# Altium PCB PCB1.PcbDoc
Units mm, origin at the board's own origin, x right, y up, seen from the top; angles counter-clockwise.
Board outline 152.4 x 101.6 mm, 2 copper layers (Top Layer, Bottom Layer); 9 components, 15 nets, 63 pads, 9 vias.
Unrouted connection lines stored in the file: 3.
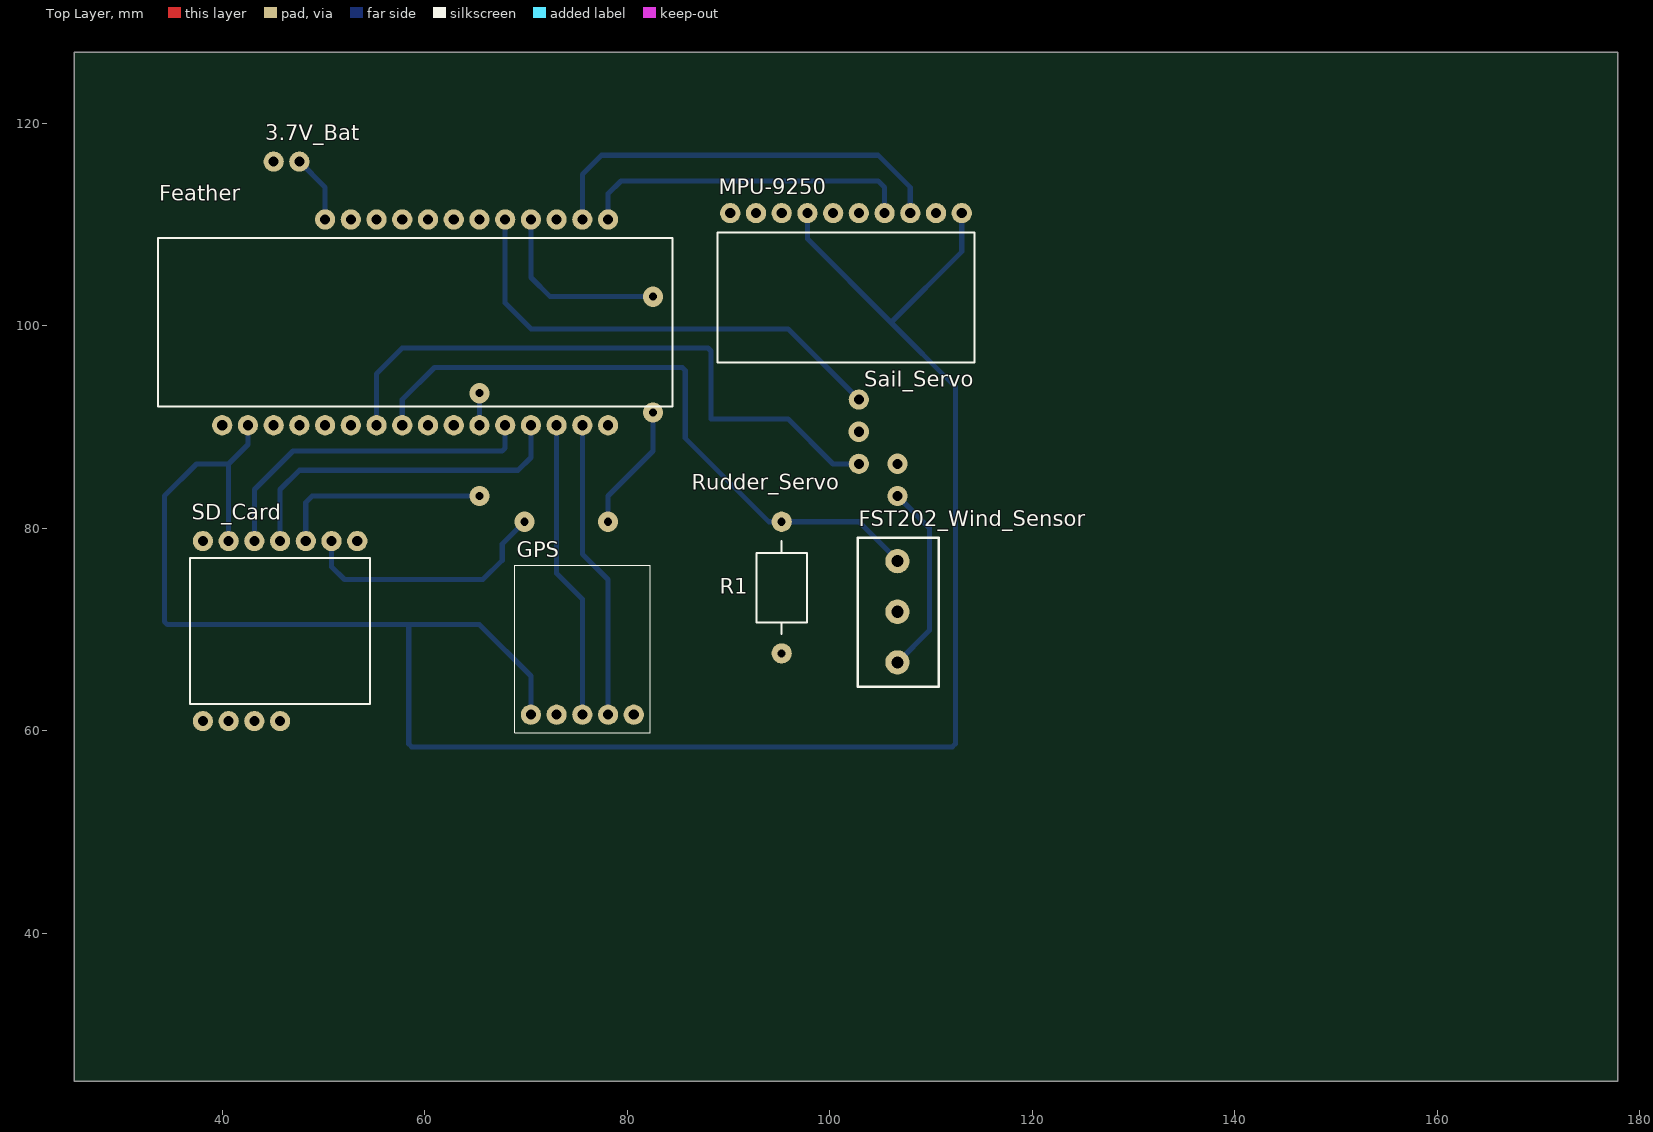
[diagram p0: Top Layer view]
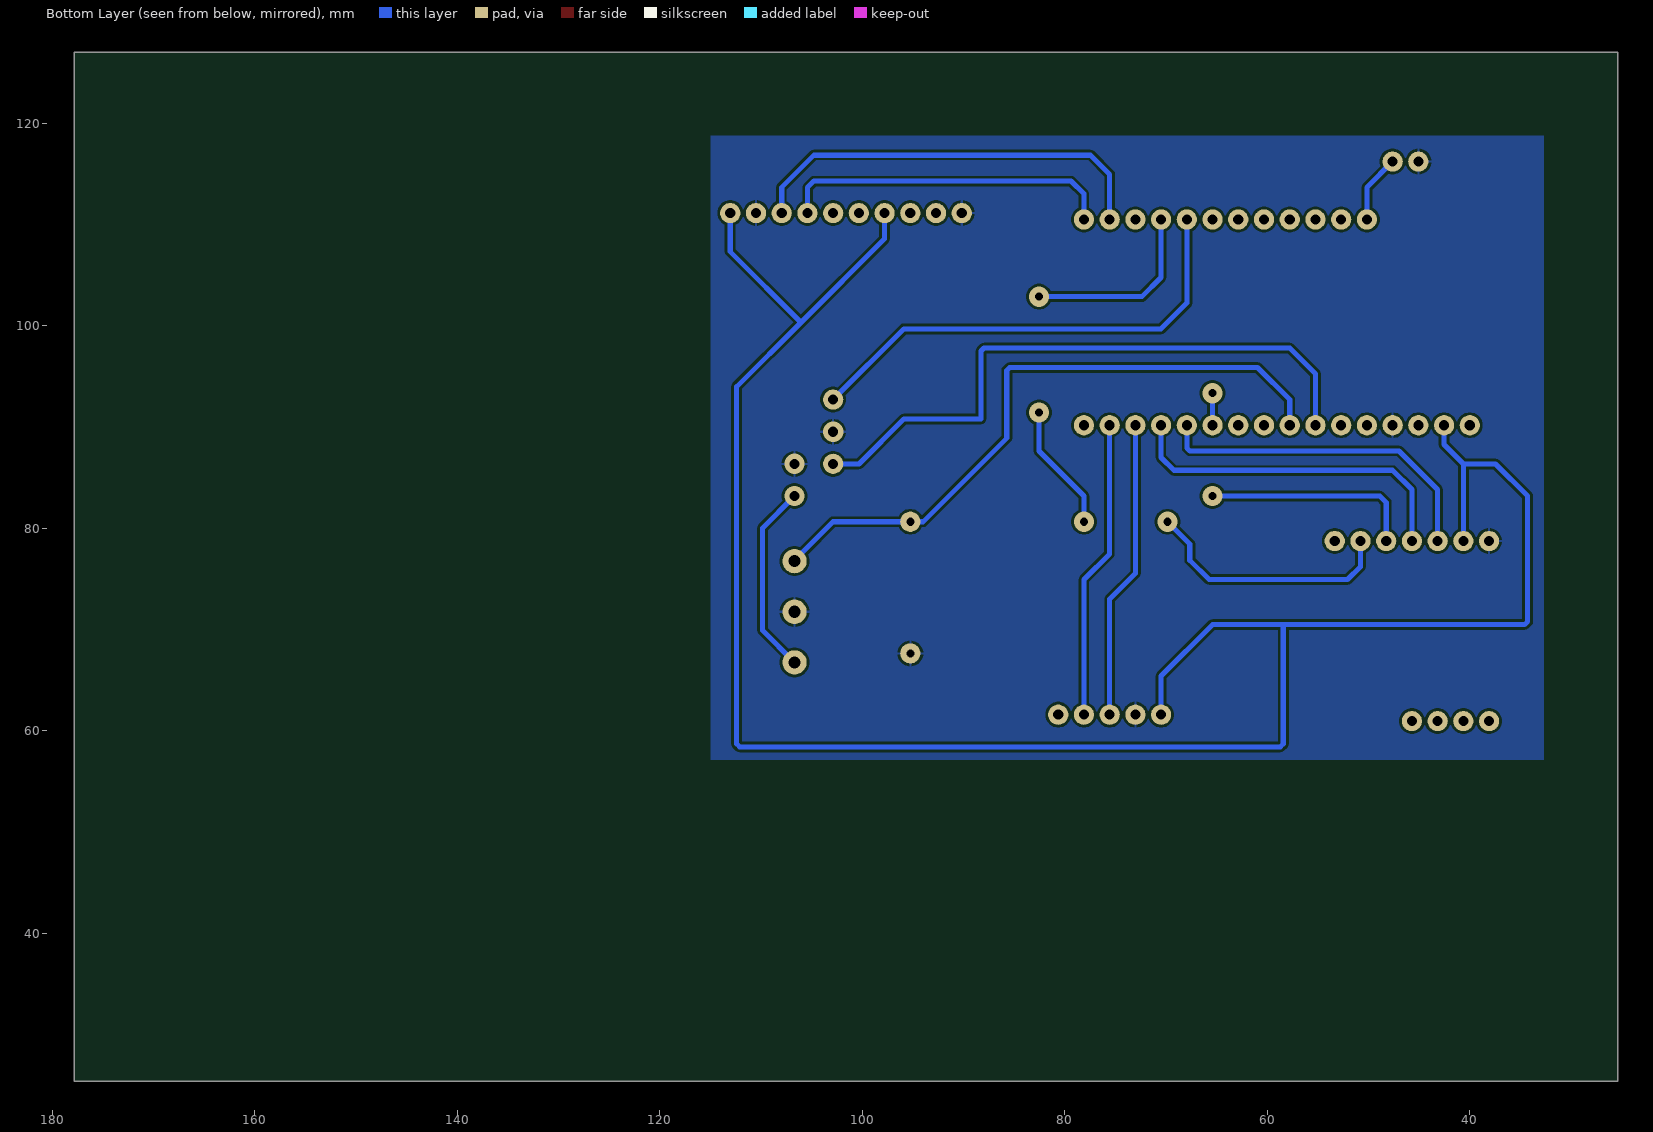
[diagram p1: Bottom Layer view, seen from below]

## Layer stack, top to bottom
Top Solder: solder mask 0.0102, Solder Resist, Dk 3.5
Top Layer: signal copper 0.0356
Dielectric 1: dielectric 0.32, FR-4, Dk 4.8
Bottom Layer: signal copper 0.0356
Bottom Solder: solder mask 0.0102, Solder Resist, Dk 3.5

## Board outline
25.4,25.4 177.8,25.4 177.8,127 25.4,127

## Design rules (kind name [scope] priority, off if disabled: settings)
Clearance [All] p1: gap=0.254 ignorepadtopadclearanceinfootprint=FALSE except(0: Arc-Hole Track-Hole SMDPad-Hole THPad-Hole Via-Hole Fill-Hole Poly-Hole Region-Hole Text-Hole; 0.33: Arc-Arc Arc-Track Arc-Via Track-Track Track-Via)
PlaneClearance [All] p1: clearance=1.143
PolygonConnect [All] p1: connectstyle=Relief reliefconductorwidth=0.254 reliefentries=4 polygonreliefangle="90 Angle" airgapwidth=0.254
RoomDefinition Sheet1 [InComponentClass('Sheet1')] p1: confinementstyle=ConfineIn formatcopy=TRUE lockcomponents=FALSE outline 24.13,50.165 122.555,50.165 122.555,121.92 24.13,121.92
RoutingVias [All] p1: holewidth=1 width=2 viastyle="Through Hole" minholewidth=1 minwidth=1.27 maxholewidth=2 maxwidth=2.032
SolderMaskExpansion [All] p1: expansion=0.102 istentingtop=FALSE
Width [All] p1: maxlimit=0.508 minlimit=0.254 preferedwidth=0.508
29 further rules are at their usual default settings.

## Components (designator, comment, footprint, x,y, rotation, side; value= is the part's Value field where it differs from the comment)
3.7V_Bat "Power_Input" POWER_INPUT 47.625,116.205 r270 top
Feather "Adafuit_feather_STM32F405" ADAFUIT_FEATHER_STM32F405 40.005,90.17 r90 top locked
FST202_Wind_Sensor "Screw_Terminal" SCREW_TERMINAL 106.68,76.755 r0 top
GPS "GPS_ATGM336H" GPS 70.485,61.595 r90 top
MPU-9250 "MPU-9250/6500" MPU-9250/6500 113.03,111.125 r270 top
R1 "Res1" Resistor 95.25,80.645 r270 top value=1K
Rudder_Servo "External_Connection_output" CONNECTOR 102.87,86.36 r90 top
Sail_Servo "External_Connection_output" CONNECTOR 102.87,92.71 r90 top
SD_Card "SD_Card_Socket" SD_CARD_SOCKET 38.1,60.96 r90 top

## Footprints (in the part's own frame and the unit in brackets; to place one, negate y for a bottom-side part, rotate by r counter-clockwise, add the part's x,y. Pads: shape width x height; smd on the part's side, far side on the other; paste and mask are expansions set on the pad)
ADAFUIT_FEATHER_STM32F405 [mm]
  round 2 hole 1: 3.3V(0,-2.54) 3.3V(1)(0,-5.08) 5(20.32,-33.02) 6(20.32,-30.48) 9(20.32,-27.94) 10(20.32,-25.4) 11(20.32,-22.86) 12(20.32,-20.32) 13(20.32,-17.78) A0(0,-10.16) A1(0,-12.7) A2(0,-15.24) A3(0,-17.78) A4(0,-20.32) A5(0,-22.86) B0(0,-38.1) BAT(20.32,-10.16) EN(20.32,-12.7) GND(0,-7.62) MI(0,-30.48) MO(0,-27.94) RST(0,0) RX(0,-33.02) SCK(0,-25.4) SCL(20.32,-35.56) SDA(20.32,-38.1) TX(0,-35.56) USB(20.32,-15.24)
  silkscreen extent 1.84,-44.45 18.48,6.35
CONNECTOR [mm]
  round 2 hole 1: 1(0,0)
GPS [mm]
  round 2 hole 1: GND(0,-2.54) PPS(0,-10.16) RX(0,-7.62) TX(0,-5.08) VCC(0,0)
  silkscreen extent -1.8,-11.8 14.73,1.6
MPU-9250/6500 [mm]
  round 2 hole 1: AD0(0,-15.24) ECL(0,-12.7) EDA(0,-10.16) FSYNC(0,-22.86) GND(0,-2.54) INT(0,-17.78) NCS(0,-20.32) SCL(0,-5.08) SDA(0,-7.62) VCC(0,0)
  silkscreen extent 1.9,-24.13 14.73,1.27
POWER_INPUT [mm]
  round 2 hole 1: BAT(0,0) GND(0,-2.54)
Resistor [mm]
  round 2 hole 0.8: A3(0,0) GND(13,0)
  silkscreen extent 1.9,-2.5 11.1,2.5
SCREW_TERMINAL [mm]
  round 2.4 hole 1.2: 2(0,-5) 3(0,-10) A3(0,0)
  silkscreen extent -3.94,-12.42 4.06,2.31
SD_CARD_SOCKET [mm]
  round 2 hole 1: CD(17.78,-15.24) CS(17.78,-12.7) DAT1/IRQ(0,-7.62) DAT2(0,-5.08) DI(17.78,-5.08) DO(17.78,-7.62) GND(17.78,0) GND(1)(0,0) SCLK(17.78,-10.16) VDD(17.78,-2.54) VDD(1)(0,-2.54)
  silkscreen extent 1.7,-16.51 16.1,1.27

## Part data
R1: "Resistor", LatestRevisionDate=17-Jul-2002, LatestRevisionNote="Re-released for DXP Platform.", PackageDescription="Axial Device, Thru-Hole; 2 Leads; 0.3 in Pin Spacing", PackageReference=AXIAL-0.3, Published=8-Jun-2000, Publisher="Altium Limited"

## Via types
v1: diameter 2, hole 0.8, Top Layer to Bottom Layer, 6 vias
v2: diameter 2, hole 1, Top Layer to Bottom Layer, 3 vias

## Nets (pads, with @x,y where several pads share a name; then routed paths per layer and width w, separated by ;. In a path a pad name is that pad's centre, name@x,y a point inside that pad or via, vN(x,y) a via of type N, cw(c..) or ccw(c..) an arc to the next point about the centre after c; other vN are vias at no path point)
GND: 3.7V_Bat.GND Feather.GND FST202_Wind_Sensor.2 GPS.GND MPU-9250.FSYNC MPU-9250.GND R1.GND SD_Card.GND
  other v2: 106.68,86.36 102.87,89.535
Net3.7V_Bat_BAT: 3.7V_Bat.BAT Feather.BAT | length 6.8
  Bottom Layer w0.508: 3.7V_Bat.BAT 50.165,113.665 Feather.BAT
NetFeather_3.3V: Feather.3.3V GPS.VCC MPU-9250.AD0 MPU-9250.VCC SD_Card.VDD | length 212.7
  Bottom Layer w0.508: SD_Card.VDD 40.64,86.36 ; Feather.3.3V 42.545,88.265 40.64,86.36 ; GPS.VCC 70.485,65.405 65.405,70.485 58.42,70.485 ; MPU-9250.AD0 97.79,108.585 106.045,100.33 ; MPU-9250.VCC 113.03,107.315 106.045,100.33 ; 40.64,86.36 37.465,86.36 34.29,83.185 34.29,70.783 34.588,70.485 58.42,70.485 ; 58.42,70.485 58.42,58.718 58.718,58.42 112.097,58.42 112.395,58.718 112.395,93.98 106.045,100.33
NetFeather_6: Feather.6 SD_Card.CS | length 56.6
  Bottom Layer w0.508: SD_Card.CS 50.8,76.2 52.07,74.93 65.742,74.93 67.653,76.841 67.653,78.448 v1(69.85,80.645) ; Feather.6 70.485,104.775 72.39,102.87 v1(82.55,102.87) ; v1(78.105,80.645) 78.105,83.185 82.55,87.63 v1(82.55,91.44)
NetFeather_9: Feather.9 Sail_Servo.1 | length 47.1
  Bottom Layer w0.508: Feather.9 67.945,102.235 70.485,99.695 95.885,99.695 Sail_Servo.1
NetFeather_A2: Feather.A2 Rudder_Servo.1 | length 62.4
  Bottom Layer w0.508: Feather.A2 55.245,95.25 57.785,97.79 87.967,97.79 88.265,97.492 88.265,90.805 95.885,90.805 100.33,86.36 Rudder_Servo.1
NetFeather_A3: Feather.A3 FST202_Wind_Sensor.A3 R1.A3 | length 64.6
  Bottom Layer w0.508: Feather.A3 57.785,92.71 60.96,95.885 85.427,95.885 85.725,95.587 85.725,88.9 93.98,80.645 R1.A3 102.87,80.645 FST202_Wind_Sensor.A3@106.68,76.835
NetFeather_MI: Feather.MI SD_Card.DO | length 34.3
  Bottom Layer w0.508: SD_Card.DO 45.72,83.82 47.625,85.725 69.215,85.725 70.485,86.995 Feather.MI
NetFeather_MO: Feather.MO SD_Card.DI | length 33.8
  Bottom Layer w0.508: SD_Card.DI 43.18,83.82 46.99,87.63 67.647,87.63 67.945,87.928 Feather.MO
NetFeather_RX: Feather.RX GPS.TX | length 29.6
  Bottom Layer w0.508: Feather.RX 73.025,75.565 75.565,73.025 GPS.TX
NetFeather_SCK: Feather.SCK SD_Card.SCLK | length 24.4
  Bottom Layer w0.508: SD_Card.SCLK 48.26,82.55 48.895,83.185 v1(65.405,83.185) ; Feather.SCK v1(65.405,93.345)
NetFeather_SCL: Feather.SCL MPU-9250.SCL | length 41.5
  Bottom Layer w0.508: Feather.SCL 75.565,114.935 77.47,116.84 104.775,116.84 107.95,113.665 MPU-9250.SCL
NetFeather_SDA: Feather.SDA MPU-9250.SDA | length 33.2
  Bottom Layer w0.508: Feather.SDA 78.105,113.03 79.375,114.3 104.775,114.3 105.41,113.665 MPU-9250.SDA
NetFeather_TX: Feather.TX GPS.RX | length 29.6
  Bottom Layer w0.508: Feather.TX 75.565,77.47 78.105,74.93 GPS.RX
VCC_18V: FST202_Wind_Sensor.3 | length 19.1
  Bottom Layer w0.508: FST202_Wind_Sensor.3 109.855,69.93 109.855,80.01 v2(106.68,83.185)
pads on no net: Feather.3.3V(1) Feather.5 Feather.10 Feather.11 Feather.12 Feather.13 Feather.A0 Feather.A1 Feather.A4 Feather.A5 Feather.B0 Feather.EN Feather.RST Feather.USB GPS.PPS MPU-9250.ECL MPU-9250.EDA MPU-9250.INT MPU-9250.NCS SD_Card.CD SD_Card.DAT1/IRQ SD_Card.DAT2 SD_Card.GND(1) SD_Card.VDD(1)

## Polygon pours and split planes (outlines as drawn)
GND on Bottom Layer "GND_L02_P000" (solid, pour order 0): 32.699,118.745 114.935,118.745 114.935,57.15 32.699,57.15

## Silkscreen, mask and mechanical layers (free items; w line width, h text height)
Mechanical 1:
  lines w0.254: 31.75,55.245 31.75,120.65 116.84,120.65 116.84,55.245 31.75,55.245